# EAGLE board iMX233-OLINUXINO-MAXI_Rev_C2 (EAGLE 4.16), part 1 of 3
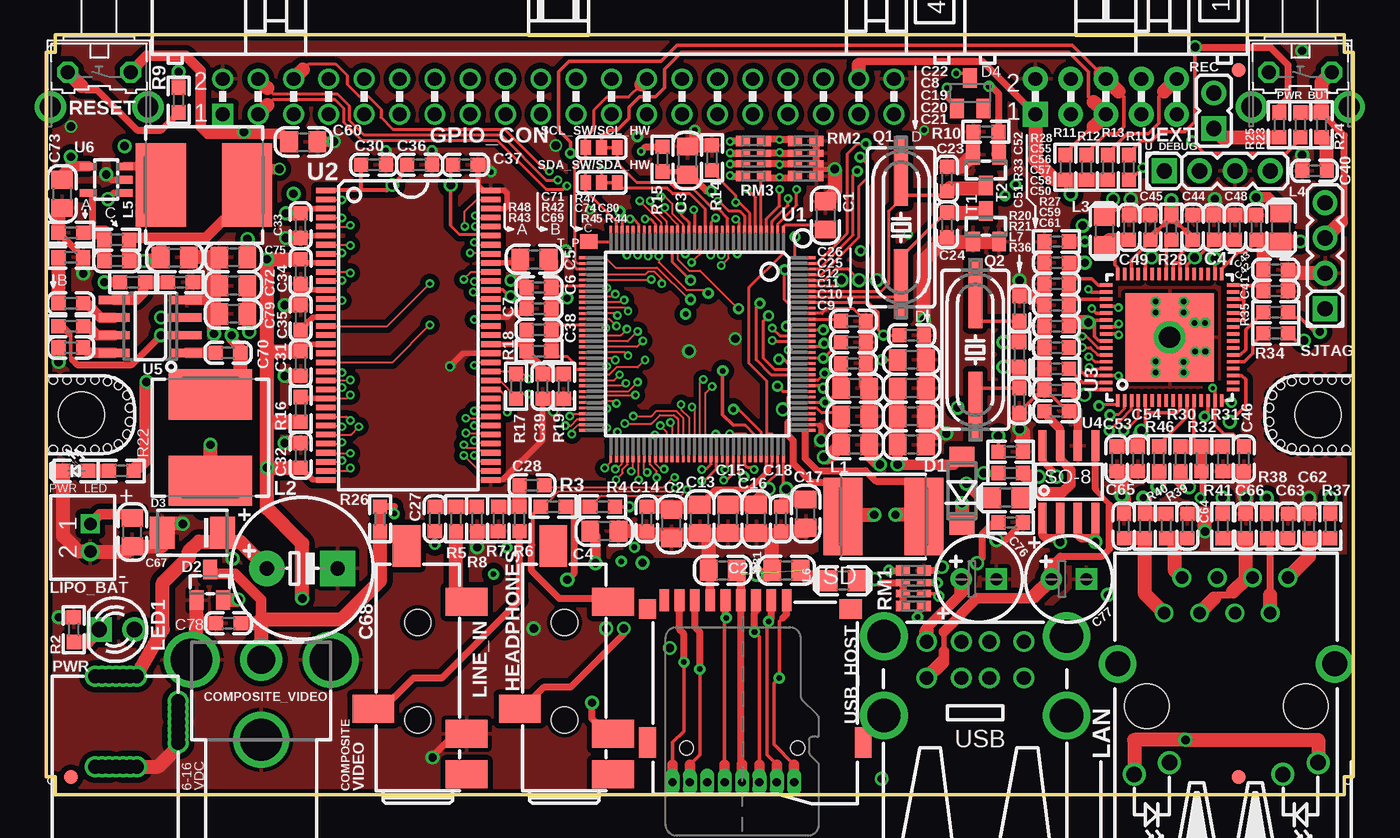
[diagram p0: board, top side]
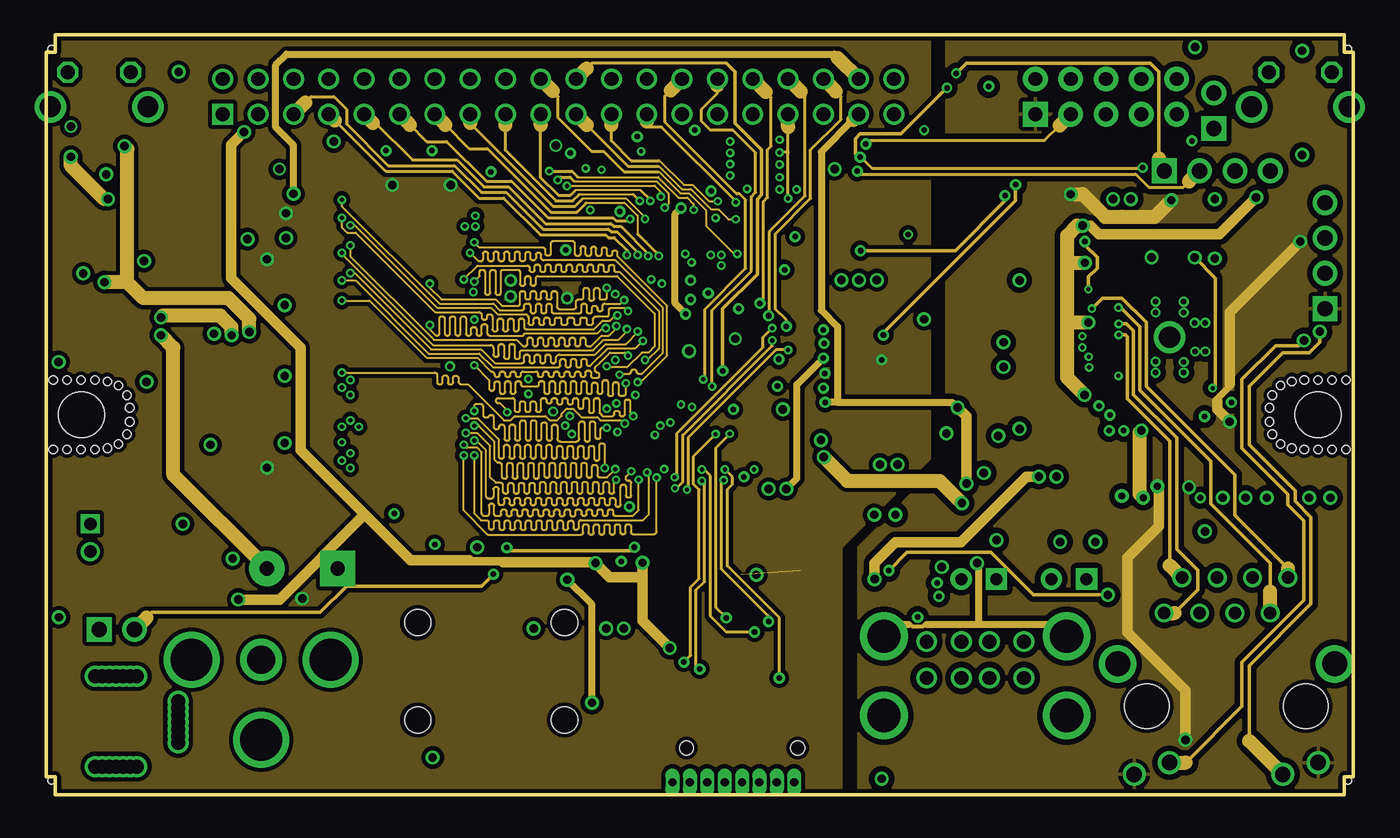
[diagram p1: board, inner layer Route2]
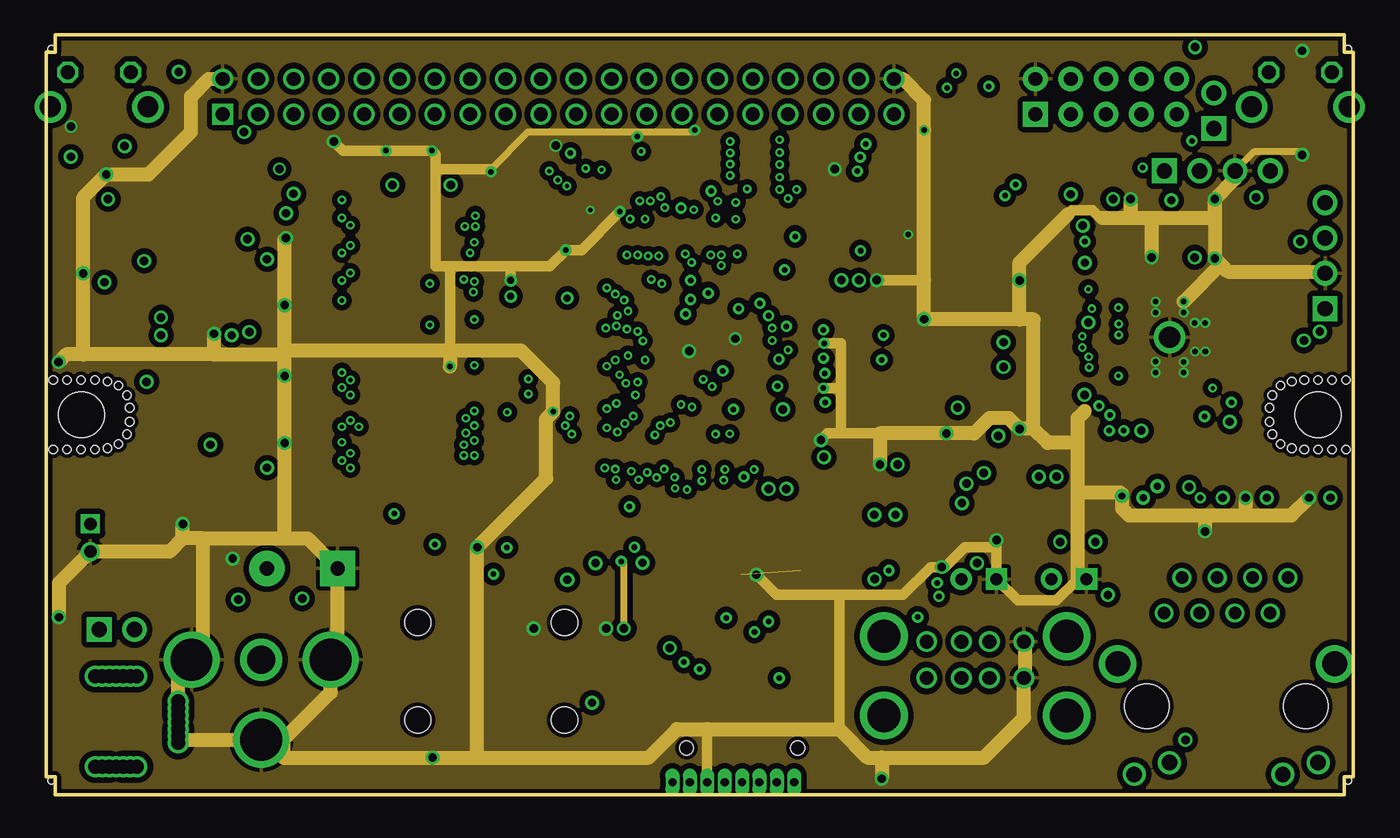
[diagram p2: board, inner layer Route15]
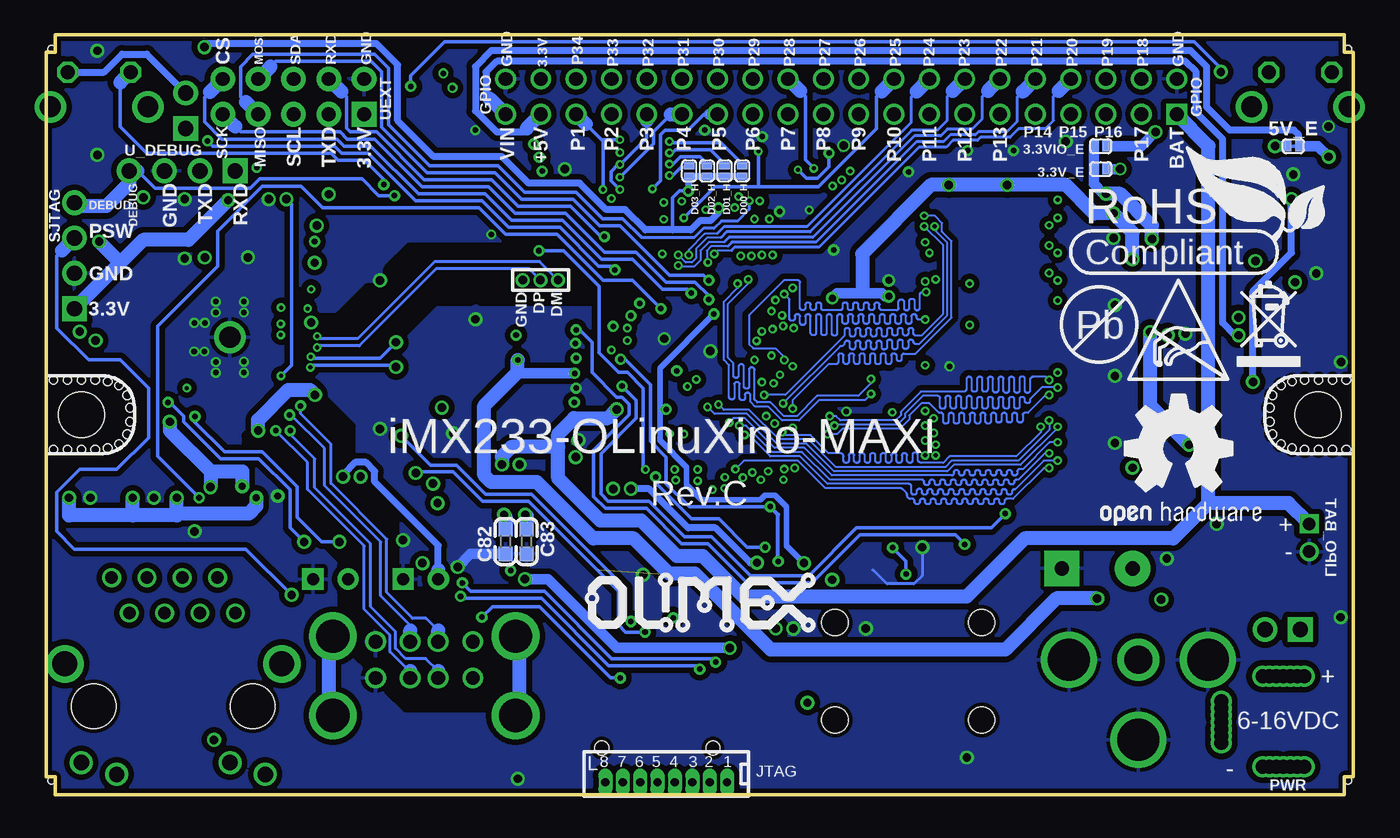
[diagram p3: board, bottom side, seen from below]

Size 93.98 x 54.61 mm. Coordinates in mm from the lower left corner, seen from the top.
Copper layers (1*2*15*16): Top 0.035mm / dielectric 0.5mm / Route2 0.035mm / dielectric 0.5mm / Route15 0.035mm / dielectric 0.5mm / Bottom 0.035mm
Design rules "default": minimum track width 6mil, minimum drill 0.3mm, track to track 0.1499mm, track to pad 6mil, pad to pad 6mil, via to via 6mil, smd to smd 1mil, copper to edge 10mil, drill to drill 8mil, minimum pad ring 6mil, minimum via ring 6mil, stop-mask expansion 4mil, vias tented up to drill 25mil, thermal gap 12mil
Net classes: 1 PWR: width 0.203 mm, drill 0.076 mm, clearance 0.4 mm
tRestrict: 10 lines
bRestrict: 35 lines
Milling: area 11.3,-22.2 to 19.6,-13.8; area 24.2,-25.4 to 29.3,-20.3; area 3.3,-13.7 to 6.6,-10.4; area 1.9,78.1 to 5.7,81.9; area 34.7,-25.4 to 39.8,-20.3; area 88.3,78.1 to 92.1,81.9; 52 lines

## Footprints (pad centres in the part's own frame; a part is rotated, then mirrored left to right if it is on the bottom)
SJ_1_SMALLER = smd 0.508 x 0.762: 1 -0.381,0; 2 0.381,0
SJ_1_SMALLER_CLOSE = smd 0.508 x 0.762: 1 -0.381,0; 2 0.381,0
C0805_5MIL_DWS = smd 1.27 x 1.524: 1 -1.016,0; 2 1.016,0
C0603_DWS = smd 1.016 x 1.016: 1 -0.889,0; 2 0.889,0
E5-10,5 = drill 1.016 pad 2.54 round: + -2.54,0 | drill 1.016 pad 2.54 square: - 2.54,0
E2,5-6,3 = drill 0.864 pad 1.524 round: + -1.27,0 | drill 0.864 pad 1.524 square: - 1.27,0
VIDEO_CON = drill 3 round: GND1 -5,-5.75; GND2 0,0; GND3 5,-5.75 | drill 2 round: IO 0,-5.75
MLL-41 = smd 1.45 x 1.8: A 2.445,0; K -2.445,0
SOT23C(BAT54S) = smd 1 x 1.4: 1 -0.95,-1.1; 2 0.95,-1.1; 3 0,1.1
DO214AA = smd 1.778 x 2.286: A 2.177,0; C -2.177,0
SOT23C = smd 1 x 1.4: 1 -0.95,-1.1; 2 0.95,-1.1; 3 0,1.1
TESTPAD60/90_WITHOUT_MASK = drill 1.524 pad 2.286 round: P$1 0,0
BH40R = drill 1 square: 1 -24.13,-1.27 | drill 1 round: 2 -24.13,1.27; 3 -21.59,-1.27; 4 -21.59,1.27; 5 -19.05,-1.27; 6 -19.05,1.27; 7 -16.51,-1.27; 8 -16.51,1.27; 9 -13.97,-1.27; 10 -13.97,1.27; 11 -11.43,-1.27; 12 -11.43,1.27; 13 -8.89,-1.27; 14 -8.89,1.27; 15 -6.35,-1.27; 16 -6.35,1.27; 17 -3.81,-1.27; 18 -3.81,1.27; 19 -1.27,-1.27; 20 -1.27,1.27; 21 1.27,-1.27; 22 1.27,1.27; 23 3.81,-1.27; 24 3.81,1.27; 25 6.35,-1.27; 26 6.35,1.27; 27 8.89,-1.27; 28 8.89,1.27; 29 11.43,-1.27; 30 11.43,1.27; 31 13.97,-1.27; 32 13.97,1.27; 33 16.51,-1.27; 34 16.51,1.27; 35 19.05,-1.27; 36 19.05,1.27; 37 21.59,-1.27; 38 21.59,1.27; 39 24.13,-1.27; 40 24.13,1.27
PJ-W47S-05D2-LF_5PIN_V2 = smd 2 x 3: 1 2.1,-0.5; 2 14.5,-0.5; 3 6.8,6.2; 5 5,-0.5 | smd 3 x 2: 4 18.5,3.8 | hole 1.9: 6,3; 13,3
WU08S = drill 0.6 pad 0.991 long: 1 -4.375,0; 2 -3.125,0; 3 -1.875,0; 4 -0.625,0; 5 0.625,0; 6 1.875,0; 7 3.125,0; 8 4.375,0
CD53 = smd 2.794 x 5.588: 1 -2.921,0; 2 2.921,0
8X8MM_3131 = smd 3.6 x 6: 1 -3.1,0; 2 3.1,0
L0805_5MIL_DWS = smd 1.27 x 1.524: 1 -1.016,0; 2 1.016,0
RJLD-043TC_PACK = drill 0.9 round: 1 -4.455,6.7; 2 -3.185,9.24; 3 -1.915,6.7; 4 -0.645,9.24; 5 0.625,6.7; 6 1.895,9.24; 7 3.165,6.7; 8 4.435,9.24 | drill 1.1 round: AG -6.61,-4.9; AY 6.61,-4.05; KG -4.07,-4.05; KY 4.07,-4.9 | drill 1.8 round: HI -7.8,3.05; SHI 7.8,3.05 | hole 3.2: -5.715,0; 5.715,0
LED-3.0MM = drill 1.092 pad 1.778 round: A -1.27,0 | drill 1.092 pad 1.778 square: K 1.27,0
DW02S = drill 0.9 square: 1 -1,0 | drill 0.9 round: 2 1,0
PWR_JACK_UNI_MILLING = drill 1 round: + 0,4.75; +1 0,5.25; +2 0,5.75; +3 0,6.25; +4 0,4.25; +5 0,3.75; +6 0,3.25; - -6.5,4.75; -1 -6.5,5.25; -2 -6.5,5.75; -3 -6.5,4.25; -4 -6.5,3.75; -5 -6.5,6.25; -6 -6.5,3.25; -- -3.3,0.3; --1 -3.8,0.3; --2 -4.3,0.3; --3 -4.8,0.3; --4 -2.8,0.3; --5 -2.3,0.3; --6 -1.8,0.3
B3F-31XX = drill 1.016 octagon: 1 -2.261,-1.245; 2 2.261,-1.245 | drill 1.499 pad 2.159 round: 3 -3.505,1.245; 4 3.505,1.245
LED-0603 = smd 1.016 x 1.016: A 0.889,0; C -0.889,0
HC49/SMD2_THIN = smd 5 x 1: 1 -4.064,0; 2 4.064,0
R0603_5MIL_DWS = smd 1.016 x 1.016: 1 -0.889,0; 2 0.889,0
R0603_5MIL_DWS_NA = smd 1.016 x 1.016: 1 -0.889,0; 2 0.889,0
0603_0R = smd 1.016 x 1.016: 1 -0.889,0; 2 0.889,0
JP1 = drill 1.1 pad 1.778 square: 1 0,-1.27 | drill 1.1 pad 1.778 round: 2 0,1.27
R_MATRIX_4 = smd 1.016 x 0.762: 1.1 -0.762,1.27; 1.2 0.762,1.27; 4.1 -0.762,-1.27; 4.2 0.762,-1.27 | smd 1.016 x 0.508: 2.1 -0.762,0.381; 2.2 0.762,0.381; 3.1 -0.762,-0.381; 3.2 0.762,-0.381
SJ_2_SMALL = smd 0.762 x 1.016: 1 -1.143,0; 2 0,0; 3 1.143,0
TFC-WPAPR-08 = smd 0.7 x 1.6: 1 -3.2,-0.125; 2 -2.1,-0.125; 3 -1,-0.125; 4 0.1,-0.125; 5 1.2,-0.125; 6 2.3,-0.125; 7 3.4,-0.125; 8 4.5,-0.125; 9 5.6,-0.125 | smd 1.2 x 1.4: 10 6.8,0.5 | smd 1.6 x 1.4: 11 -7.8,0.5 | smd 1.2 x 2.2: 12 6.8,10.1; 13 -8.7,10.1 | hole 1: 4,10.5; -4,10.5
HN1X4 = drill 1.1 pad 1.778 square: 1 -3.81,0 | drill 1.1 pad 1.778 round: 2 -1.27,0; 3 1.27,0; 4 3.81,0
SOT23 = smd 1 x 1.4: 1 -0.95,-1.1; 2 0.95,-1.1; 3 0,1.1
SMD50/40 = smd 1.27 x 1.016: P$1 0,0
TQFP128LD = smd 0.2 x 1.5: 1 -6.2,-7.75; 2 -5.8,-7.75; 3 -5.4,-7.75; 4 -5,-7.75; 5 -4.6,-7.75; 6 -4.2,-7.75; 7 -3.8,-7.75; 8 -3.4,-7.75; 9 -3,-7.75; 10 -2.6,-7.75; 11 -2.2,-7.75; 12 -1.8,-7.75; 13 -1.4,-7.75; 14 -1,-7.75; 15 -0.6,-7.75; 16 -0.2,-7.75; 17 0.2,-7.75; 18 0.6,-7.75; 19 1,-7.75; 20 1.4,-7.75; 21 1.8,-7.75; 22 2.2,-7.75; 23 2.6,-7.75; 24 3,-7.75; 25 3.4,-7.75; 26 3.8,-7.75; 27 4.2,-7.75; 28 4.6,-7.75; 29 5,-7.75; 30 5.4,-7.75; 31 5.8,-7.75; 32 6.2,-7.75; 65 6.2,7.75; 66 5.8,7.75; 67 5.4,7.75; 68 5,7.75; 69 4.6,7.75; 70 4.2,7.75; 71 3.8,7.75; 72 3.4,7.75; 73 3,7.75; 74 2.6,7.75; 75 2.2,7.75; 76 1.8,7.75; 77 1.4,7.75; 78 1,7.75; 79 0.6,7.75; 80 0.2,7.75; 81 -0.2,7.75; 82 -0.6,7.75; 83 -1,7.75; 84 -1.4,7.75; 85 -1.8,7.75; 86 -2.2,7.75; 87 -2.6,7.75; 88 -3,7.75; 89 -3.4,7.75; 90 -3.8,7.75; 91 -4.2,7.75; 92 -4.6,7.75; 93 -5,7.75; 94 -5.4,7.75; 95 -5.8,7.75; 96 -6.2,7.75 | smd 1.5 x 0.2: 33 7.75,-6.2; 34 7.75,-5.8; 35 7.75,-5.4; 36 7.75,-5; 37 7.75,-4.6; 38 7.75,-4.2; 39 7.75,-3.8; 40 7.75,-3.4; 41 7.75,-3; 42 7.75,-2.6; 43 7.75,-2.2; 44 7.75,-1.8; 45 7.75,-1.4; 46 7.75,-1; 47 7.75,-0.6; 48 7.75,-0.2; 49 7.75,0.2; 50 7.75,0.6; 51 7.75,1; 52 7.75,1.4; 53 7.75,1.8; 54 7.75,2.2; 55 7.75,2.6; 56 7.75,3; 57 7.75,3.4; 58 7.75,3.8; 59 7.75,4.2; 60 7.75,4.6; 61 7.75,5; 62 7.75,5.4; 63 7.75,5.8; 64 7.75,6.2; 97 -7.75,6.2; 98 -7.75,5.8; 99 -7.75,5.4; 100 -7.75,5; 101 -7.75,4.6; 102 -7.75,4.2; 103 -7.75,3.8; 104 -7.75,3.4; 105 -7.75,3; 106 -7.75,2.6; 107 -7.75,2.2; 108 -7.75,1.8; 109 -7.75,1.4; 110 -7.75,1; 111 -7.75,0.6; 112 -7.75,0.2; 113 -7.75,-0.2; 114 -7.75,-0.6; 115 -7.75,-1; 116 -7.75,-1.4; 117 -7.75,-1.8; 118 -7.75,-2.2; 119 -7.75,-2.6; 120 -7.75,-3; 121 -7.75,-3.4; 122 -7.75,-3.8; 123 -7.75,-4.2; 124 -7.75,-4.6; 125 -7.75,-5; 126 -7.75,-5.4; 127 -7.75,-5.8; 128 -7.75,-6.2
66TSOP-II = smd 0.4 x 1.4: 1 -10.4,-5.925; 2 -9.75,-5.925; 3 -9.1,-5.925; 4 -8.45,-5.925; 5 -7.8,-5.925; 6 -7.15,-5.925; 7 -6.5,-5.925; 8 -5.85,-5.925; 9 -5.2,-5.925; 10 -4.55,-5.925; 11 -3.9,-5.925; 12 -3.25,-5.925; 13 -2.6,-5.925; 14 -1.95,-5.925; 15 -1.3,-5.925; 16 -0.65,-5.925; 17 0,-5.925; 18 0.65,-5.925; 19 1.3,-5.925; 20 1.95,-5.925; 21 2.6,-5.925; 22 3.25,-5.925; 23 3.9,-5.925; 24 4.55,-5.925; 25 5.2,-5.925; 26 5.85,-5.925; 27 6.5,-5.925; 28 7.15,-5.925; 29 7.8,-5.925; 30 8.45,-5.925; 31 9.1,-5.925; 32 9.75,-5.925; 33 10.4,-5.925; 34 10.4,5.925; 35 9.75,5.925; 36 9.1,5.925; 37 8.45,5.925; 38 7.8,5.925; 39 7.15,5.925; 40 6.5,5.925; 41 5.85,5.925; 42 5.2,5.925; 43 4.55,5.925; 44 3.9,5.925; 45 3.25,5.925; 46 2.6,5.925; 47 1.95,5.925; 48 1.3,5.925; 49 0.65,5.925; 50 0,5.925; 51 -0.65,5.925; 52 -1.3,5.925; 53 -1.95,5.925; 54 -2.6,5.925; 55 -3.25,5.925; 56 -3.9,5.925; 57 -4.55,5.925; 58 -5.2,5.925; 59 -5.85,5.925; 60 -6.5,5.925; 61 -7.15,5.925; 62 -7.8,5.925; 63 -8.45,5.925; 64 -9.1,5.925; 65 -9.75,5.925; 66 -10.4,5.925
QFN64 = smd 0.9 x 0.25: 1 -4.55,3.75; 2 -4.55,3.25; 3 -4.55,2.75; 4 -4.55,2.25; 5 -4.55,1.75; 6 -4.55,1.25; 7 -4.55,0.75; 8 -4.55,0.25; 9 -4.55,-0.25; 10 -4.55,-0.75; 11 -4.55,-1.25; 12 -4.55,-1.75; 13 -4.55,-2.25; 14 -4.55,-2.75; 15 -4.55,-3.25; 16 -4.55,-3.75; 33 4.55,-3.75; 34 4.55,-3.25; 35 4.55,-2.75; 36 4.55,-2.25; 37 4.55,-1.75; 38 4.55,-1.25; 39 4.55,-0.75; 40 4.55,-0.25; 41 4.55,0.25; 42 4.55,0.75; 43 4.55,1.25; 44 4.55,1.75; 45 4.55,2.25; 46 4.55,2.75; 47 4.55,3.25; 48 4.55,3.75 | smd 0.25 x 0.9: 17 -3.75,-4.55; 18 -3.25,-4.55; 19 -2.75,-4.55; 20 -2.25,-4.55; 21 -1.75,-4.55; 22 -1.25,-4.55; 23 -0.75,-4.55; 24 -0.25,-4.55; 25 0.25,-4.55; 26 0.75,-4.55; 27 1.25,-4.55; 28 1.75,-4.55; 29 2.25,-4.55; 30 2.75,-4.55; 31 3.25,-4.55; 32 3.75,-4.55; 49 3.75,4.55; 50 3.25,4.55; 51 2.75,4.55; 52 2.25,4.55; 53 1.75,4.55; 54 1.25,4.55; 55 0.75,4.55; 56 0.25,4.55; 57 -0.25,4.55; 58 -0.75,4.55; 59 -1.25,4.55; 60 -1.75,4.55; 61 -2.25,4.55; 62 -2.75,4.55; 63 -3.25,4.55; 64 -3.75,4.55 | smd 6.35 x 6.35: 65 0,0
SO-8 = smd 0.6 x 2.2: 1 -1.905,-2.6; 2 -0.635,-2.6; 3 0.635,-2.6; 4 1.905,-2.6; 5 1.905,2.6; 6 0.635,2.6; 7 -0.635,2.6; 8 -1.905,2.6
SOIC8 = smd 0.6 x 2.2: 1 -1.905,-2.6; 2 -0.635,-2.6; 3 0.635,-2.6; 4 1.905,-2.6; 5 1.905,2.6; 6 0.635,2.6; 7 -0.635,2.6; 8 -1.905,2.6
SOT23-5 = smd 0.55 x 1.2: 1 -0.95,-1.3; 2 0,-1.3; 3 0.95,-1.3; 4 0.95,1.3; 5 -0.95,1.3
FIDUCIAL-1X2 = smd 1 x 1: 1 0,0
JM42_PACTEC-101X61X25_MILLED = hole 3.3: 2.54,27.305; 91.44,27.305 | hole 0.6: 0.5,24.8; 1.5,24.8; 2.5,24.8; 3.5,24.8; 4.4,24.9; 0.5,29.8; 1.5,29.8; 2.5,29.8; 3.5,29.8; 4.4,29.7; 5.2,25.2; 5.2,29.4; 5.8,28.7; 5.8,25.9; 6,26.8; 6,27.8; 93.45,29.8; 92.45,29.8; 91.45,29.8; 90.45,29.8; 89.55,29.7; 93.45,24.8; 92.45,24.8; 91.45,24.8; 90.45,24.8; 89.55,24.9; 88.75,29.4; 88.75,25.2; 88.15,25.9; 88.15,28.7; 87.95,27.8; 87.95,26.8 | hole 0.5: 0.381,1.016; 93.599,1.016; 93.599,53.594; 0.381,53.594
BH10R = drill 1 pad 1.778 square: 1 -5.08,-1.27 | drill 1 pad 1.778 round: 2 -5.08,1.27; 3 -2.54,-1.27; 4 -2.54,1.27; 5 0,-1.27; 6 0,1.27; 7 2.54,-1.27; 8 2.54,1.27; 9 5.08,-1.27; 10 5.08,1.27
USB_TWO_LEVEL = drill 1 round: 1.1 -3.5,2.62; 1.2 -1,2.62; 1.3 1,2.62; 1.4 3.5,2.62; 2.1 -3.5,0; 2.2 -1,0; 2.3 1,0; 2.4 3.5,0 | drill 2.4 round: GND1 -6.57,-2.7; GND2 6.57,-2.7; GND3 6.57,3; GND4 -6.57,3

## Placement (x,y rotation side)
3.3V_E  Close  [SJ_1_SMALLER]  18.16,44.96 180 bottom
3.3VIO_E  Open  [SJ_1_SMALLER]  18.16,46.61 0 bottom
5V_E  Close  [SJ_1_SMALLER_CLOSE]  4.32,46.61 0 bottom
C1  22uF/6.3V  [C0805_5MIL_DWS]  56.03,41.63 270 top
C2  22uF/6.3V  [C0805_5MIL_DWS]  44.96,19.43 90 top
C3  22uF/6.3V  [C0805_5MIL_DWS]  46.1,45.57 270 top
C4  22uF/6.3V  [C0805_5MIL_DWS]  40.13,18.92 180 top
C5  22uF/6.3V  [C0805_5MIL_DWS]  35.1,38.48 0 top
C6  100nF  [C0603_DWS]  35.43,36.45 0 top
C7  100nF  [C0603_DWS]  35.43,34.92 0 top
C8  22uF/6.3V  [C0805_5MIL_DWS]  62.23,31.24 180 top
C9  22uF/6.3V  [C0805_5MIL_DWS]  58.17,25.15 180 top
C10  22uF/6.3V  [C0805_5MIL_DWS]  58.17,27.18 180 top
C11  22uF/6.3V  [C0805_5MIL_DWS]  58.17,29.21 180 top
C12  100nF  [C0603_DWS]  58.04,30.99 180 top
C13  22uF/6.3V  [C0805_5MIL_DWS]  46.99,19.81 90 top
C14  100nF  [C0603_DWS]  43.18,19.81 90 top
C15  22uF/6.3V  [C0805_5MIL_DWS]  49.02,19.81 90 top
C16  22uF/6.3V  [C0805_5MIL_DWS]  51.05,19.81 90 top
C17  22uF/6.3V  [C0805_5MIL_DWS]  54.61,20.19 90 top
C18  100nF  [C0603_DWS]  52.83,19.81 90 top
C19  22uF/6.3V  [C0805_5MIL_DWS]  62.23,29.21 180 top
C20  22uF/6.3V  [C0805_5MIL_DWS]  62.23,27.18 180 top
C21  22uF/6.3V  [C0805_5MIL_DWS]  62.23,25.15 180 top
C22  100nF  [C0603_DWS]  62.23,33.02 180 top
C23  4.7pF  [C0603_DWS]  64.77,44.25 270 top
C24  4.7pF  [C0603_DWS]  64.77,40.94 90 top
C25  100nF  [C0603_DWS]  58.04,32.51 180 top
C26  1uF  [C0603_DWS]  58.04,34.04 180 top
C27  1uF  [C0603_DWS]  27.94,19.81 270 top
C28  1uF  [C0603_DWS]  34.92,22.23 0 top
C29  22uF/6.3V  [C0805_5MIL_DWS]  53.21,16.13 0 top
C30  100nF  [C0603_DWS]  23.55,45.26 180 top
C31  100nF  [C0603_DWS]  18.29,30.99 90 top
C32  100nF  [C0603_DWS]  18.29,24.38 270 top
C33  100nF  [C0603_DWS]  18.29,40.89 90 top
C34  100nF  [C0603_DWS]  18.29,37.59 90 top
C35  10uF/10V  [C0603_DWS]  18.29,34.29 270 top
C36  100nF  [C0603_DWS]  26.85,45.26 180 top
C37  10uF/10V  [C0603_DWS]  30.15,45.26 180 top
C38  100nF  [C0603_DWS]  35.43,33.4 180 top
C39  100nF  [C0603_DWS]  35.69,29.34 90 top
C40  100nF  [C0603_DWS]  91.19,44.83 180 top
C41  100nF  [C0603_DWS]  88.39,36.2 180 top
C42  100nF  [C0603_DWS]  88.39,37.72 180 top
C43  100nF  [C0603_DWS]  87,40.77 270 top
C44  100nF  [C0603_DWS]  82.42,40.77 270 top
C45  100nF  [C0603_DWS]  79.38,40.77 270 top
C46  100nF  [C0603_DWS]  86.11,24.13 90 top
C47  100nF  [C0603_DWS]  83.95,40.77 270 top
C48  4.7uF  [C0603_DWS]  85.47,40.77 270 top
C49  100nF  [C0603_DWS]  77.85,40.77 270 top
C50  4.7uF  [C0603_DWS]  72.64,32.13 0 top
C51  33pF  [C0603_DWS]  69.98,28.32 270 top
C52  33pF  [C0603_DWS]  69.98,34.92 90 top
C53  100nF  [C0603_DWS]  76.96,24.13 270 top
C54  100nF  [C0603_DWS]  78.49,24.13 270 top
C55  100nF  [C0603_DWS]  72.64,38.23 180 top
C56  100nF  [C0603_DWS]  72.64,36.7 180 top
C57  100nF  [C0603_DWS]  72.64,35.18 180 top
C58  100nF  [C0603_DWS]  72.64,33.66 180 top
C59  100nF  [C0603_DWS]  72.64,29.08 180 top
C60  22uF/6.3V  [C0805_5MIL_DWS]  18.49,46.91 0 top
C61  10uF/10V  [C0603_DWS]  72.64,27.56 0 top
C62  15pF  [C0603_DWS]  90.81,19.3 90 top
C63  15pF  [C0603_DWS]  89.28,19.3 90 top
C64  15pF  [C0603_DWS]  82.04,19.3 90 top
C65  15pF  [C0603_DWS]  77.47,19.3 90 top
C66  22nF  [C0603_DWS]  86.23,19.3 90 top
C67  22uF/6.3V  [C0805_5MIL_DWS]  6.2,18.87 90 top
C68  470uF/25V/LOWESR/105C  [E5-10,5]  18.41,16.26 0 top
C69  100nF  [C0603_DWS]  1.78,32.13 180 top
C70  10nF  [C0603_DWS]  13.08,31.75 0 top
C71  3.3nF  [C0603_DWS]  1.78,35.31 180 top
C72  22uF/6.3V  [C0805_5MIL_DWS]  13.46,36.58 180 top
C73  22uF/6.3V  [C0805_5MIL_DWS]  1.14,43.18 270 top
C74  22pF  [C0603_DWS]  5.08,38.35 180 top
C75  22uF/6.3V  [C0805_5MIL_DWS]  13.46,38.61 180 top
C76  100uF/16V/LOWESR/105C/6.3x11mm_RM2.5  [E2,5-6,3]  67.06,15.49 0 top
C77  100uF/16V/LOWESR/105C/6.3x11mm_RM2.5  [E2,5-6,3]  73.53,15.49 0 top
C78  47pF  [C0603_DWS]  13.11,12.32 180 top
C79  22uF/6.3V  [C0805_5MIL_DWS]  13.46,34.54 180 top
C80  22uF/6.3V  [C0805_5MIL_DWS]  9.25,38.61 0 top
C81  22uF/6.3V  [C0805_5MIL_DWS]  48.64,16.13 0 top
C82  NA  [C0603_DWS]  60.96,18.19 90 bottom
C83  100pF  [C0603_DWS]  59.44,18.19 90 bottom
COMPOSITE_VIDEO  VIDEO_CON  [VIDEO_CON]  15.45,3.94 180 top
D00_H  Close  [SJ_1_SMALLER]  43.94,44.83 270 bottom
D1  SS14  [MLL-41]  65.84,21.84 90 top
D01_H  Open  [SJ_1_SMALLER]  45.21,44.83 270 bottom
D2  BAT54S  [SOT23C(BAT54S)]  11.79,15.09 0 top
D02_H  Open  [SJ_1_SMALLER]  46.48,44.83 270 bottom
D3  SMBJ16A  [DO214AA]  10.52,18.82 180 top
D03_H  Close  [SJ_1_SMALLER]  47.75,44.83 270 bottom
D4  BAT54C  [SOT23C]  66.42,50.42 0 top
GND  TESTPADTESTPAD60/90_WITHOUT_MASK  [TESTPAD60/90_WITHOUT_MASK]  80.77,32.87 0 top
GPIO_CON  BH40R  [BH40R]  36.83,50.16 0 top
HEADPHONES  AUDIO_JACK_5PINPJ-W47S-05D2-LF_V2  [PJ-W47S-05D2-LF_5PIN_V2]  40.26,-0.64 90 top
JTAG  NA(WU08S)  [WU08S]  49.4,0.89 180 bottom
L1  22uH/1.3A/SW68  [CD53]  60.2,19.99 0 top
L2  10uH/2.3A/YS75/7x8  [8X8MM_3131]  11.81,25.65 270 top
L3  FB0805/600R/2A  [L0805_5MIL_DWS]  76.07,40.51 270 top
L4  FB0805/600R/2A  [L0805_5MIL_DWS]  88.77,40.77 90 top
L5  2.2uH/3A/YS75/7x8  [8X8MM_3131]  11.35,43.81 0 top
L6  CL470nH/0805/1.76R/250mA  [L0805_5MIL_DWS]  57.28,15.37 180 top
L7  FB0805/600R/2A  [L0805_5MIL_DWS]  69.01,21.34 180 top
LAN  RJLD-043TC  [RJLD-043TC_PACK]  84.84,6.35 0 top
LED1  LED/GREEN/3MM  [LED-3.0MM]  5.08,11.86 180 top
LINE_IN  AUDIO_JACK_5PINPJ-W47S-05D2-LF_V2  [PJ-W47S-05D2-LF_5PIN_V2]  29.72,-0.64 90 top
LIPO_BAT  DW02S  [DW02S]  3.17,18.47 270 top
PWR  YDJ-1136  [PWR_JACK_UNI_MILLING]  9.78,8.51 90 top
PWR_BUT  TV-06B  [B3F-31XX]  90.17,50.67 180 top
PWR_LED  LED/RED/0603  [LED-0603]  2.11,23.27 0 top
Q1  Q24.000MHz/HC-49SM/SMD/20ppm/20pF  [HC49/SMD2_THIN]  61.47,40.77 90 top
Q2  Q25.000MHz/HC-49SM  [HC49/SMD2_THIN]  66.8,31.97 270 top
R1  4.7k  [R0603_5MIL_DWS]  77.85,45.09 90 top
R2  560R  [R0603_5MIL_DWS]  1.98,11.86 270 top
R3  120R  [R0603_5MIL_DWS]  36.45,20.7 180 top
R4  120R  [R0603_5MIL_DWS]  40.01,20.7 0 top
R5  10k  [R0603_5MIL_DWS]  29.46,19.81 270 top
R6  10k  [R0603_5MIL_DWS]  34.04,19.81 270 top
R7  4.7k  [R0603_5MIL_DWS]  32.51,19.81 90 top
R8  4.7k  [R0603_5MIL_DWS]  30.99,19.81 90 top
R9  47k  [R0603_5MIL_DWS]  9.53,49.91 270 top
R10  47k  [R0603_5MIL_DWS]  67.56,47.65 180 top
R11  2.2k  [R0603_5MIL_DWS]  73.28,45.09 270 top
R12  2.2k  [R0603_5MIL_DWS]  74.8,45.09 270 top
R13  47k  [R0603_5MIL_DWS]  76.33,45.09 270 top
R14  NA(47k)  [R0603_5MIL_DWS]  47.88,45.77 270 top
R15  47k  [R0603_5MIL_DWS]  44.32,45.67 90 top
R16  10k  [R0603_5MIL_DWS]  18.29,27.69 270 top
R17  120R  [R0603_5MIL_DWS]  33.78,29.34 270 top
R18  1k/1%  [R0603_5MIL_DWS]  35.43,31.88 0 top
R19  1k/1%  [R0603_5MIL_DWS]  37.21,29.34 90 top
R20  1M  [R0603_5MIL_DWS]  69.34,24.64 0 top
R21  10k  [R0603_5MIL_DWS]  69.34,23.11 0 top
R22  1k  [R0603_5MIL_DWS]  5.41,23.27 180 top
R23  1k  [R0603_5MIL_DWS]  90.17,48.13 90 top
R24  1k  [R0603_5MIL_DWS]  91.69,48.13 90 top
R25  10k  [R0603_5MIL_DWS_NA]  88.65,48.13 90 top
R26  0R(Board_Mounted)  [0603_0R]  24,19.81 270 top
R27  12k/1%  [R0603_5MIL_DWS]  72.64,30.61 0 top
R28  12.4k/1%  [R0603_5MIL_DWS]  72.64,39.75 0 top
R29  10k  [R0603_5MIL_DWS]  80.9,40.77 270 top
R30  NA  [R0603_5MIL_DWS]  81.53,24.13 90 top
R31  10k  [R0603_5MIL_DWS]  84.58,24.13 90 top
R32  0R(Board_Mounted)  [0603_0R]  83.06,24.13 90 top
R33  1M  [R0603_5MIL_DWS]  69.98,31.62 270 top
R34  560R  [R0603_5MIL_DWS]  88.39,33.15 0 top
R35  560R  [R0603_5MIL_DWS]  88.39,34.67 0 top
R36  560R  [R0603_5MIL_DWS]  69.34,19.56 180 top
R37  49.9R/1%  [R0603_5MIL_DWS]  92.33,19.3 90 top
R38  49.9R/1%  [R0603_5MIL_DWS]  87.76,19.3 90 top
R39  49.9R/1%  [R0603_5MIL_DWS]  80.52,19.3 90 top
R40  49.9R/1%  [R0603_5MIL_DWS]  78.99,19.3 90 top
R41  10R/1%  [R0603_5MIL_DWS]  84.58,19.3 90 top
R42  47k  [R0603_5MIL_DWS]  1.78,33.66 0 top
R43  2.2k  [R0603_5MIL_DWS]  1.78,38.61 0 top
R44  1.1k/1%  [R0603_5MIL_DWS]  9.65,36.83 0 top
R45  4.99k/1%  [R0603_5MIL_DWS]  6.22,36.83 180 top
R46  10k  [R0603_5MIL_DWS]  80.01,24.13 90 top
R47  4.99k/1%  [R0603_5MIL_DWS]  5.08,39.88 180 top
R48  1.1k/1%  [R0603_5MIL_DWS]  1.78,40.39 180 top
REC  NA(HN1x2)  [JP1]  83.95,49.15 0 top
RESET  TV-06B  [B3F-31XX]  3.81,50.67 180 top
RM1  RA1206_(4X0603)_4B8_100K  [R_MATRIX_4]  62.36,14.83 180 top
RM2  RA1206_(4X0603)_4B8_47K  [R_MATRIX_4]  54.61,45.72 180 top
RM3  RA1206_(4X0603)_4B8_4.7K  [R_MATRIX_4]  50.85,45.72 180 top
SCL_SW/SCL_HW  SCL_SW:Open/SCL_HW:Close  [SJ_2_SMALL]  39.93,46.51 180 top
SD  MICRO_SD/MMC_CP_NEWTFC-WPAPR-08  [TFC-WPAPR-08]  50.04,13.84 180 top
SDA_SW/SDA_HW  SDA_SW:Open/SDA_HW:Close  [SJ_2_SMALL]  39.93,43.99 180 top
SJTAG  (NA)HN1X4  [HN1X4]  91.95,38.73 90 top
T1  BC846B  [SOT23]  67.56,40.84 0 top
T2  BC846B  [SOT23]  67.56,44.88 180 top
T_P  TESTPAD50/40  [SMD50/40]  39.01,39.75 0 top
U1  MCIMX233CAG4C  [TQFP128LD]  46.8,32.38 180 top
U2  HY5DU121622D(L)T(P)-J  [66TSOP-II]  26.04,33.02 270 top
U3  LAN9512-JZX  [QFN64]  80.77,32.86 90 top
U4  MIC2026-1YM  [SO-8]  73.53,22.48 0 top
U5  MP1482DS  [SOIC8]  7.49,33.66 90 top
U6  SY8008C(AA)C  [SOT23-5]  4.32,44.2 90 top
U$1  FIDUCIAL1X2  [FIDUCIAL-1X2]  1.78,1.27 180 top
U$2  FIDUCIAL1X2  [FIDUCIAL-1X2]  85.72,1.27 180 top
U$3  FIDUCIAL1X2  [FIDUCIAL-1X2]  85.72,52.07 180 top
U$5  [LOGO-OPENHARDWARE_8X8]  12.57,24.77 0 bottom
U$6  [JM42_PACTEC-101X61X25_MILLED]  0,0 0 top
U$8  [OLIMEX1_V]  37.51,11.53 0 bottom
U$9  [PB]  18.29,33.78 0 bottom
U$10  [ESD_SYMBOL]  16.13,29.84 0 bottom
U$11  [RECYCLE_BIN1/8]  8.38,30.73 0 bottom
U$12  [ROHS]  19.3,38.1 0 bottom
U_DEBUG  HN1X4  [HN1X4]  84.2,44.83 0 top
UEXT  BH10R  [BH10R]  76.2,50.16 0 top
USB_HOST  USB_TWO_LEVEL  [USB_TWO_LEVEL]  66.8,8.38 0 top

## Library data of the parts
3.3V_E 3.3VIO_E 5V_E D00_H D01_H D02_H D03_H REC SCL_SW/SCL_HW SDA_SW/SDA_HW = jumper
C1-C83 L1 L3 L4 L6 L7 R1-R25 R27-R31 R33-R48 = rcl
COMPOSITE_VIDEO LAN SD USB_HOST = OLIMEX_CONNECTORS
D1 GND HEADPHONES LINE_IN PWR T_P = gogo
D2 D4 T1 T2 = semicon-smd-ipc
D3 L2 L5 R26 R32 RM1-RM3 = OLIMEX_DISCRET
GPIO_CON UEXT = con-harting-ml
JTAG LIPO_BAT SJTAG U_DEBUG = Penko
LED1 PWR_LED = DOUBLE-SIDE
PWR_BUT RESET = switch-omron
Q1 Q2 = crystal
U1-U6 = OLIMEX_IC
U$1-U$3 = SparkFunEagle-6-6-07
U$5 U$8-U$12 = olimex_logo1
U$6 = OLIMEX_CASES

## Nets
+5V: 5V_E.2 C11.2 C12.2 C73.1 GPIO_CON.37 L7.2 R22.1 U1.102 U6.1 U6.4
+15V: C68.+ D3.C GPIO_CON.39 PWR.+ R42.1 U5.2
+24V: C19.2 C20.2 C21.2 C67.2 D1.A GPIO_CON.1 LIPO_BAT.1 U1.100 U1.103
A0: U1.76 U2.29
A1: U1.75 U2.30
A2: U1.74 U2.31
A3: U1.73 U2.32
A4: U1.72 U2.35
A5: U1.71 U2.36
A6: U1.70 U2.37
A7: U1.69 U2.38
A8: U1.68 U2.39
A9: U1.67 U2.40
A10: U1.66 U2.28
A11: U1.65 U2.41
A12: U1.64 U2.42
AUART1_RXD: U1.128 UEXT.4
AUART1_TXD: U1.127 UEXT.3
BA0: U1.79 U2.26
BA1: U1.80 U2.27
CASN: U1.61 U2.22
CKE: U1.78 U2.44
CLK: R17.2 U1.36 U2.45
CLKN: R17.1 U1.37 U2.46
CS: R16.1 U1.63 U2.24
D0: U1.41 U2.2
D1: U1.43 U2.4
D2: U1.42 U2.5
D3: U1.44 U2.7
D4: U1.47 U2.8
D5: U1.48 U2.10
D6: U1.49 U2.11
D7: U1.50 U2.13
D8: U1.51 U2.54
D9: U1.52 U2.56
D10: U1.54 U2.57
D11: U1.55 U2.59
D12: U1.57 U2.60
D13: U1.58 U2.62
D14: U1.60 U2.63
D15: U1.59 U2.65
DCDC_VDDA: C17.2 C18.2 C25.2 U1.96 U1.110
DCDC_VDDD: C1.2 C2.2 C13.2 C14.2 U1.1 U1.93 U1.94
DEBUG: SJTAG.4 U1.89 U_DEBUG.4
DQM0: U1.46 U2.20
DQM1: U1.56 U2.47
DQS0: U1.39 U2.16
DQS1: U1.40 U2.51
GND [PWR]: C1.1 C2.1 C3.1 C4.1 C5.1 C6.1 C7.1 C8.1 C9.1 C10.1 C11.1 C12.1 C13.1 C14.1 C15.1 C16.1 C17.1 C18.1 C19.1 C20.1 C21.1 C22.1 C23.1 C24.1 C25.1 C26.1 C29.1 C30.1 C31.1 C32.1 C33.1 C34.1 C35.1 C36.1 C37.1 C39.1 C40.2 C41.1 C42.1 C43.1 C44.1 C45.1 C46.1 C47.1 C48.1 C49.1 C50.1 C51.2 C52.2 C53.2 C54.2 C55.2 C56.2 C57.2 C58.2 C59.2 C60.2 C61.2 C62.2 C63.2 C64.2 C65.2 C66.2 C67.1 C68.- C69.2 C72.2 C73.2 C75.2 C76.- C77.- C78.2 C79.2 C80.2 C81.1 C82.1 C83.1 COMPOSITE_VIDEO.GND1 COMPOSITE_VIDEO.GND2 COMPOSITE_VIDEO.GND3 D2.1 D3.A GND.P$1 GPIO_CON.2 GPIO_CON.40 JTAG.3 LINE_IN.5 LIPO_BAT.2 PWR.- PWR.-- PWR_LED.C R2.1 R7.1 R8.1 R10.2 R14.1 R19.1 R20.2 R27.1 R28.1 R31.1 R36.1 R43.2 R44.2 R48.2 RM1.4.1 RM2.1.1 RM2.2.1 RM2.3.1 RM2.4.1 SD.6 SJTAG.2 T1.1 T1.2 T2.2 U1.30 U1.35 U1.98 U1.105 U1.112 U1.118 U2.6 U2.12 U2.34 U2.48 U2.52 U2.58 U2.64 U2.66 U3.34 U3.44 U3.65 U4.6 U5.4 U6.2 U_DEBUG.3 UEXT.2 USB_HOST.1.4 USB_HOST.2.4
HP_VGND: HEADPHONES.5 R3.1 R4.1 U1.111
I2C_SCL: R11.1 SCL_SW/SCL_HW.2 UEXT.5
I2C_SDA: R12.1 SDA_SW/SDA_HW.2 UEXT.6
LED1 [PWR]: LED1.A U1.88
N$1: C61.1 L7.1 U4.7
N$2: C46.2 C47.2 C48.2 U3.15 U3.38
N$3: C49.2 L3.2 U3.48
N$4: C78.1 COMPOSITE_VIDEO.IO D2.3 R26.2
N$5: R46.2 U3.11
N$6: LINE_IN.2 R5.2
N$7: C38.2 C39.2 R18.1 R19.2 U2.49
N$8: R25.1 REC.1
N$10: D4.3 U_DEBUG.1
N$11: C50.2 L3.1 U3.62
N$12: R27.2 U3.63
N$15: HEADPHONES.2 R3.2 U1.113
N$17: R28.2 U3.50
N$18: C82.2 L1.2 U1.97
N$19: C83.2 L1.1 U1.99
N$21: HEADPHONES.3 R4.2 U1.109
N$23: 5V_E.1 C72.1 C79.1 L2.2 R45.2
N$24: R29.2 U3.41
N$25: C26.2 U1.117
N$29: LINE_IN.3 R6.2
N$30: C51.1 Q2.2 R33.2 U3.61
N$32: C28.1 R6.1 R7.2
N$33: C27.1 R5.1 R8.2
N$34: C27.2 U1.115
N$35: C28.2 U1.114
N$36: C69.1 U5.8
N$37: R42.2 U5.7
N$38: C40.1 R24.1
N$39: C52.1 Q2.1 R33.1 U3.60
N$40: R34.1 U3.21
N$41: R35.1 U3.22
N$42: LED1.K R2.2
N$43: R9.1 R10.1 T2.1
N$45: LAN.KG R34.2
N$46: C70.1 U5.1
N$47: LAN.KY R35.2
N$48: C62.1 LAN.8 R37.1 U3.53
N$49: R30.2 R31.2 R32.2 U3.12
N$50: C70.2 L2.1 U5.3
N$51: C63.1 LAN.7 R38.1 U3.52
N$52: C64.1 LAN.2 R39.1 U3.56
N$53: C65.1 LAN.1 R40.1 U3.55
N$54: C66.1 LAN.3 LAN.6 R41.1
N$55: U3.1 USB_HOST.1.2
N$56: U3.2 USB_HOST.1.3
N$57: U3.3 USB_HOST.2.2
N$58: U3.4 USB_HOST.2.3
N$59: R36.2 USB_HOST.GND1 USB_HOST.GND2 USB_HOST.GND3 USB_HOST.GND4
N$60: C71.1 U5.6
N$61: C71.2 R43.1
N$62: R44.1 R45.1 U5.5
N$64: L5.1 U6.3
N$65: 3.3V_E.1 C74.1 C80.1 L5.2 R47.1
N$66: C74.2 R47.2 R48.1 U6.5
N$101: D03_H.1 RM3.1.2
N$103: D02_H.1 RM3.2.2
N$104: D01_H.1 RM3.3.2
N$105: D00_H.1 RM3.4.2
N$129: PWR_LED.A R22.2
PIN1/LCD_D00: GPIO_CON.35 RM2.4.2 RM3.4.1 U1.2
PIN2/LCD_D01: GPIO_CON.33 RM2.3.2 RM3.3.1 U1.3
PIN3/LCD_D02: GPIO_CON.31 RM2.2.2 RM3.2.1 U1.4
PIN4/LCD_D03: GPIO_CON.29 RM2.1.2 RM3.1.1 U1.5
PIN5/LCD_D04: GPIO_CON.27 U1.6
PIN6/LCD_D05: GPIO_CON.25 R14.2 U1.7
PIN7/LCD_D06: GPIO_CON.23 U1.8
PIN8/LCD_D07: GPIO_CON.21 U1.9
PIN9/LCD_D08/SSP2_MISO: GPIO_CON.19 U1.22 UEXT.7
PIN10/LCD_D09: GPIO_CON.17 U1.23
PIN11/LCD_D10: GPIO_CON.15 U1.24
PIN12/LCD_D11/UEXT_CS: GPIO_CON.13 R13.1 U1.25 UEXT.10
PIN13/LCD_D12: GPIO_CON.11 U1.27
PIN14/LCD_D13: GPIO_CON.9 U1.26
PIN15/LCD_D14: GPIO_CON.7 U1.29
PIN16/LCD_D15: GPIO_CON.5 U1.28
PIN17/LCD_D16: GPIO_CON.3 U1.19
PIN18/LCD_D17/LAN_RES: GPIO_CON.4 R32.1 U1.20
PIN19/LCD_DOTCLK: GPIO_CON.6 U1.17
PIN20/LCD_VSYNC: GPIO_CON.8 U1.16
PIN21/LCD_HSYNC/I2C_SDA: GPIO_CON.10 SDA_SW/SDA_HW.1 U1.15
PIN22/LCD_EN/I2C_SCL: GPIO_CON.12 SCL_SW/SCL_HW.1 U1.11
PIN23/LCD_DISP: GPIO_CON.14 U1.12
PIN24/LCD_WR: GPIO_CON.16 U1.13
PIN25/LCD_RS: GPIO_CON.18 R15.2 U1.14
PIN26/LCD_CS: GPIO_CON.20 U1.10
PIN27/PWM2 [PWR]: GPIO_CON.22 U1.91
PIN28/SOFT_SDA: GPIO_CON.24 SDA_SW/SDA_HW.3 U1.31
PIN29/SOFT_SCL: GPIO_CON.26 SCL_SW/SCL_HW.3 U1.34
PIN30: GPIO_CON.28 U1.81
PIN31: GPIO_CON.30 U1.82
PIN32/LRADC1: GPIO_CON.32 U1.107
PIN33/LRADC0: GPIO_CON.34 U1.108
PIN34/MIC: GPIO_CON.36 U1.116
PRTCTL2: U3.14 U4.1 U4.2
PRTCTL3: U3.16 U4.3 U4.4
PSWITCH: R23.1 U1.119
PWM0/DUART_RXD: D4.1 R1.1 U1.125
PWM1/DUART_TXD: U1.126 U_DEBUG.2
RASN: U1.62 U2.23
RESET: R9.2 RESET.2
SD_VCC: C29.2 C81.2 JTAG.5 L6.2 SD.4
SJTAG_PSW: PWR_BUT.1 R23.2 R24.2 REC.2 RM1.4.2 SJTAG.3
SSP1_CMD: JTAG.6 R21.1 SD.3 U1.83
SSP1_DATA0: JTAG.2 RM1.2.1 SD.7 U1.84
SSP1_DATA1: JTAG.1 RM1.3.1 SD.8 U1.85
SSP1_DATA2: JTAG.8 RM1.1.1 SD.1 U1.86
SSP1_DATA3: JTAG.7 R20.1 SD.2 U1.87
SSP1_SCK: JTAG.4 SD.5 U1.90
SSP2_MOSI: U1.21 UEXT.8
SSP2_SCK: U1.33 UEXT.9
TEST_PAD: T_P.P$1 U1.32
USB_DM: U1.123 U3.58
USB_DP: U1.124 U3.59
USB_PWR_A: C76.+ U4.8 USB_HOST.1.1
USB_PWR_B: C77.+ U4.5 USB_HOST.2.1
V+: C5.2 C6.2 C7.2 C8.2 C30.2 C31.2 C32.2 C33.2 C34.2 C35.2 C36.2 C37.2 C38.1 R16.2 R18.2 U1.38 U1.45 U1.53 U1.106 U2.1 U2.3 U2.9 U2.15 U2.18 U2.33 U2.55 U2.61
VCC [PWR]: 3.3V_E.2 3.3VIO_E.1 C41.2 C42.2 C43.2 C44.2 C45.2 C75.1 GPIO_CON.38 L4.1 LAN.AG LAN.AY R11.2 R12.2 R13.2 R29.1 R30.1 R46.1 SJTAG.1 U3.19 U3.27 U3.28 U3.29 U3.30 U3.32 U3.33 U3.39 U3.40 U3.46 UEXT.1
VDAC1: R26.1 U1.104
VDD: C53.1 C54.1 C55.1 C56.1 C57.1 C58.1 C59.1 L4.2 R37.2 R38.2 R39.2 R40.2 R41.2 U3.5 U3.10 U3.49 U3.51 U3.54 U3.57 U3.64
VDD4P2: C9.2 C10.2 D1.K U1.101
VDDXTAL: C22.2 PWR_BUT.2 U1.120
VPP [PWR]: 3.3VIO_E.2 C3.2 C4.2 C15.2 C16.2 C60.1 D00_H.2 D01_H.2 D2.2 D02_H.2 D03_H.2 L6.1 R1.2 R15.1 R21.2 R25.2 RESET.1 RM1.1.2 RM1.2.2 RM1.3.2 U1.18 U1.92 U1.95
WEN: U1.77 U2.21
XTALI: C23.2 Q1.2 T2.3 U1.122
XTALO: C24.2 Q1.1 T1.3 U1.121

## Tracks (layer width: path | path; a pad name or v marks a point on that pad's centre or on a via)
+5V  (via drill 0.4 pad 0.8, 0.6 pad 1)
  Top 0.203: U1.102 55.99,28.18 v56.01,28.19 56.13,28.19 C11.2
  Top 0.508: U6.1 4.89,43.25 v4.45,42.8
  Top 0.762: U6.4 1.78,45.15 1.78,45.21 | v1.78,45.85 1.78,45.21 | C73.1 1.14,44.58 1.78,45.21 | L7.2 67.18,21.34 v66.17,22.35
  Top 1.016: C11.2 C12.2 | R22.1 7.21,24.18 v7.21,29.67
  Route2 0.508: 58.01,48.49 55.73,46.2 | 55.73,46.2 | 55.73,46.2 55.73,34.8 56.9,33.63 56.9,28.19 | 56.9,28.19 v56.01,28.19 | 56.9,28.19 65.15,28.19 v65.53,27.81
  Route2 0.762: v65.53,27.81 66.17,27.18 v66.17,22.35
  Route2 1.016: GPIO_CON.37 58.01,48.49 | v4.45,42.8 4.19,42.8 1.78,45.21 v1.78,45.85
  Bottom 0.508: 59.44,47.88 59.69,47.62 61.59,47.62 63.12,49.15 63.12,52.32 61.98,53.47 11.68,53.47 10.54,52.32 10.54,49.4 8.89,47.75 4.27,47.75 3.94,47.42 5V_E.2 3.81,46.61 | v7.21,29.67 7.21,36.17 4.45,38.94 v4.45,42.8
  Bottom 0.762: v1.78,45.85 2.54,46.61 3.81,46.61
  Bottom 1.016: 59.44,47.88 GPIO_CON.37
+15V  (via drill 0.6 pad 1)
  Top 0.254: 1.14,33.66 R42.1 | 1.91,31.24 1.78,31.37 1.78,33.02 1.65,33.15
  Top 0.508: 1.65,33.15 1.14,33.66 | 1.91,31.24 2.29,30.86 6.1,30.86 v8.26,33.02
  Top 0.61: v8.26,33.02 U5.2
  Top 1.016: 12.69,18.19 D3.C | C68.+ 13.95,18.19 12.69,18.19 | 12.69,18.19 10.97,18.19 10.26,17.48 10.26,17.09 8.38,15.21 8.38,11.86 6.48,8.51 PWR.+
  Route2 1.016: v8.26,33.02 9.14,32.13 9.14,22.99 C68.+
  Bottom 0.508: v8.26,33.02 8.51,33.02 9.4,33.91 9.4,47.12 11.3,49.02 11.3,51.94 12.06,52.7 61.59,52.7 62.36,51.94 62.36,50.29 62.1,50.04
  Bottom 1.016: 62.1,50.04 GPIO_CON.39
+24V  (via drill 0.6 pad 1)
  Top 0.203: U1.100 53.34,27.38 53.34,27.69 | v52.96,27.69 53.34,27.69 | U1.103 53.34,28.58 53.34,27.69
  Top 0.762: C67.2 5.94,20.14 3.85,20.14 LIPO_BAT.1 | D1.A 65.27,23.72 v61.21,23.72 C21.2
  Top 1.016: C19.2 C20.2 C21.2
  Bottom 1.016: 10.41,20.95 10.41,46.61 GPIO_CON.1 | 10.41,20.95 12.95,18.41 23.62,18.41 27.81,14.22 43.84,14.22 46.76,17.14 48.64,17.14 51.18,19.68 54.13,19.68 57.17,22.73 57.17,24.99 | LIPO_BAT.1 4.66,20.95 10.41,20.95 | 57.17,24.99 60.53,24.99 61.21,24.31 v61.21,23.72 61.21,23.75 | v52.96,27.69 53.59,27.05 56.03,27.05 57.17,25.91 57.17,24.99
A0  (via drill 0.3 pad 0.5)
  Top 0.152: U1.76 45,26.63 v44.88,26.75 | U2.29 21.16,25.22 v21.26,25.32
  Bottom 0.152: v21.26,25.32 21.84,25.32 23.77,23.39 24,23.39 arc-90 24.16,23.24 24.16,23.09 arc90 24.31,22.94 24.38,22.94 arc90 24.54,23.09 24.54,23.16 arc-90 24.69,23.32 24.77,23.32 arc-90 24.92,23.16 24.92,23.09 arc90 25.07,22.94 25.15,22.94 arc90 25.3,23.09 25.3,23.16 arc-90 25.45,23.32 25.53,23.32 arc-90 25.68,23.16 25.68,23.09 arc90 25.83,22.94 25.91,22.94 arc90 26.06,23.09 26.06,23.16 arc-90 26.21,23.32 26.29,23.32 arc-90 26.44,23.16 26.44,23.09 arc90 26.59,22.94 26.67,22.94 arc90 26.82,23.09 26.82,23.16 arc-90 26.98,23.32 27.05,23.32 arc-90 27.2,23.16 27.2,23.09 arc90 27.36,22.94 27.43,22.94 arc90 27.58,23.09 27.58,23.16 arc-90 27.74,23.32 27.81,23.32 arc-90 27.96,23.16 27.96,23.09 arc90 28.12,22.94 28.19,22.94 arc90 28.35,23.09 28.35,23.16 arc-90 28.5,23.32 28.57,23.32 arc-90 28.73,23.16 28.73,23.09 arc90 28.88,22.94 37.49,22.94 39.47,24.92 41.6,24.92 43.74,27.05 44.58,27.05 v44.88,26.75
A1  (via drill 0.3 pad 0.5)
  Top 0.152: U2.30 20.14,24.54 v21.87,24.54 | U1.75 44.6,26.06 v44.15,26.52
  Bottom 0.152: v21.87,24.54 22.17,24.54 24.08,22.63 24.23,22.63 arc-90 24.38,22.48 24.38,22.43 arc90 24.51,22.3 24.61,22.3 arc90 24.77,22.45 24.77,22.48 arc-90 24.92,22.63 24.99,22.63 arc-90 25.15,22.48 25.15,22.4 arc90 25.3,22.25 25.38,22.25 arc90 25.53,22.4 25.53,22.48 arc-90 25.68,22.63 25.76,22.63 arc-90 25.91,22.48 25.91,22.4 arc90 26.06,22.25 26.14,22.25 arc90 26.29,22.4 26.29,22.48 arc-90 26.44,22.63 26.52,22.63 arc-90 26.67,22.48 26.67,22.4 arc90 26.82,22.25 26.9,22.25 arc90 27.05,22.4 27.05,22.48 arc-90 27.2,22.63 27.28,22.63 arc-90 27.43,22.48 27.43,22.4 arc90 27.58,22.25 27.66,22.25 arc90 27.81,22.4 27.81,22.48 arc-90 27.96,22.63 28.04,22.63 arc-90 28.19,22.48 28.19,22.4 arc90 28.35,22.25 28.42,22.25 arc90 28.57,22.4 28.57,22.48 arc-90 28.73,22.63 28.8,22.63 arc-90 28.96,22.48 28.96,22.4 arc90 29.11,22.25 29.18,22.25 arc90 29.34,22.4 29.34,22.48 arc-90 29.49,22.63 29.57,22.63 arc-90 29.72,22.48 29.72,22.4 arc90 29.87,22.25 29.95,22.25 arc90 30.1,22.4 30.1,22.48 arc-90 30.25,22.63 30.33,22.63 arc-90 30.48,22.48 30.48,22.4 arc90 30.63,22.25 30.71,22.25 arc90 30.86,22.4 30.86,22.48 arc-90 31.01,22.63 37.64,22.63 39.62,24.61 41.76,24.61 43.66,26.52 v44.15,26.52
A2  (via drill 0.3 pad 0.5)
  Top 0.152: U2.31 21.18,23.92 v21.26,24 | v43.76,25.86 43.94,25.86 44.2,25.6 U1.74
  Bottom 0.152: v21.26,24 22.25,24 24.31,21.95 24.38,21.95 arc-90 24.54,21.79 24.54,21.72 arc90 24.69,21.57 24.77,21.57 arc90 24.92,21.72 24.92,21.79 arc-90 25.07,21.95 25.15,21.95 arc-90 25.3,21.79 25.3,21.72 arc90 25.45,21.57 25.53,21.57 arc90 25.68,21.72 25.68,21.79 arc-90 25.83,21.95 25.91,21.95 arc-90 26.06,21.79 26.06,21.72 arc90 26.21,21.57 26.29,21.57 arc90 26.44,21.72 26.44,21.79 arc-90 26.59,21.95 26.67,21.95 arc-90 26.82,21.79 26.82,21.72 arc90 26.98,21.57 27.05,21.57 arc90 27.2,21.72 27.2,21.79 arc-90 27.36,21.95 27.43,21.95 arc-90 27.58,21.79 27.58,21.72 arc90 27.74,21.57 27.81,21.57 arc90 27.96,21.72 27.96,21.79 arc-90 28.12,21.95 28.19,21.95 arc-90 28.35,21.79 28.35,21.72 arc90 28.5,21.57 28.57,21.57 arc90 28.73,21.72 28.73,21.79 arc-90 28.88,21.95 28.96,21.95 arc-90 29.11,21.79 29.11,21.72 arc90 29.26,21.57 29.34,21.57 arc90 29.49,21.72 29.49,21.79 arc-90 29.64,21.95 29.72,21.95 arc-90 29.87,21.79 29.87,21.72 arc90 30.02,21.57 30.1,21.57 arc90 30.25,21.72 30.25,21.79 arc-90 30.4,21.95 30.48,21.95 arc-90 30.63,21.79 30.63,21.72 arc90 30.79,21.57 30.86,21.57 arc90 31.01,21.72 31.01,21.82 arc-90 31.17,21.97 31.24,21.97 arc-90 31.39,21.82 31.39,21.72 arc90 31.55,21.57 31.62,21.57 arc90 31.77,21.72 31.77,22.15 arc-90 31.95,22.33 37.8,22.33 39.78,24.31 41.91,24.31 43.46,25.86 v43.76,25.86
A3  (via drill 0.3 pad 0.5)
  Top 0.152: U2.32 21.67,23.27 v21.87,23.47 | U1.73 43.8,23.79 44.2,23.39 v44.42,23.39
  Bottom 0.152: v21.87,23.47 22.25,23.47 24.46,21.26 24.92,21.26 arc-90 25.07,21.11 25.07,21.03 arc90 25.22,20.88 25.3,20.88 arc90 25.45,21.03 25.45,21.11 arc-90 25.6,21.26 25.68,21.26 arc-90 25.83,21.11 25.83,21.03 arc90 25.98,20.88 26.06,20.88 arc90 26.21,21.03 26.21,21.11 arc-90 26.36,21.26 26.44,21.26 arc-90 26.59,21.11 26.59,21.03 arc90 26.75,20.88 26.82,20.88 arc90 26.98,21.03 26.98,21.11 arc-90 27.13,21.26 27.2,21.26 arc-90 27.36,21.11 27.36,21.03 arc90 27.51,20.88 27.58,20.88 arc90 27.74,21.03 27.74,21.11 arc-90 27.89,21.26 27.96,21.26 arc-90 28.12,21.11 28.12,21.03 arc90 28.27,20.88 28.35,20.88 arc90 28.5,21.03 28.5,21.11 arc-90 28.65,21.26 28.73,21.26 arc-90 28.88,21.11 28.88,21.03 arc90 29.03,20.88 29.11,20.88 arc90 29.26,21.03 29.26,21.11 arc-90 29.41,21.26 29.49,21.26 arc-90 29.64,21.11 29.64,21.03 arc90 29.79,20.88 29.87,20.88 arc90 30.02,21.03 30.02,21.11 arc-90 30.18,21.26 30.25,21.26 arc-90 30.4,21.11 30.4,21.03 arc90 30.56,20.88 30.63,20.88 arc90 30.79,21.03 30.79,21.11 arc-90 30.94,21.26 31.01,21.26 arc-90 31.17,21.11 31.17,21.03 arc90 31.32,20.88 31.39,20.88 arc90 31.55,21.03 31.55,21.11 arc-90 31.7,21.26 31.85,21.26 arc90 32.08,21.49 32.08,21.54 arc-45 32.16,21.71 32.39,21.95 arc-45 32.57,22.02 37.95,22.02 39.93,24 43.81,24 v44.42,23.39
A4  (via drill 0.3 pad 0.5)
  Top 0.152: U2.35 31.14,23.27 v30.02,24.38 | U1.72 43.4,23.74 43.89,23.25 v43.89,22.78
  Route2 0.152: v30.02,24.38 30.02,20.42 31.75,18.69 38.46,18.69 arc90 38.61,18.85 38.61,19.28 arc-90 38.76,19.43 38.84,19.43 arc-90 38.99,19.28 38.99,18.85 arc90 39.14,18.69 39.22,18.69 arc90 39.37,18.85 39.37,19.28 arc-90 39.52,19.43 39.6,19.43 arc-90 39.75,19.28 39.75,18.85 arc90 39.9,18.69 39.98,18.69 arc90 40.13,18.85 40.13,19.28 arc-90 40.28,19.43 40.36,19.43 arc-90 40.51,19.28 40.51,18.85 arc90 40.66,18.69 40.74,18.69 arc90 40.89,18.85 40.89,19.28 arc-90 41.05,19.43 41.12,19.43 arc-90 41.27,19.28 41.27,18.87 arc90 41.43,18.72 41.5,18.72 arc90 41.66,18.87 41.66,19.28 arc-90 41.81,19.43 41.88,19.43 arc-90 42.04,19.28 42.04,18.9 arc90 42.22,18.72 43.69,18.72 arc90 43.89,18.92 v43.89,22.78
A5  (via drill 0.3 pad 0.5)
  Top 0.152: U2.36 31.24,23.93 v30.79,24.38 | v43.2,23.16 43,23.37 U1.71
  Route2 0.152: v43.2,23.16 43.33,23.04 43.33,20.17 42.9,19.74 38.48,19.74 arc90 38.3,19.56 38.3,19.2 arc-90 38.15,19.05 38.06,19.05 arc-90 37.91,19.2 37.91,19.53 arc90 37.76,19.68 37.68,19.68 arc90 37.53,19.53 37.53,19.18 arc-90 37.38,19.02 37.3,19.02 arc-90 37.15,19.18 37.15,19.56 arc90 37,19.71 36.92,19.71 arc90 36.77,19.56 36.77,19.18 arc-90 36.62,19.02 36.54,19.02 arc-90 36.39,19.18 36.39,19.56 arc90 36.23,19.71 36.16,19.71 arc90 36.01,19.56 36.01,19.18 arc-90 35.85,19.02 35.78,19.02 arc-90 35.62,19.18 35.62,19.56 arc90 35.47,19.71 35.4,19.71 arc90 35.24,19.56 35.24,19.18 arc-90 35.09,19.02 35.02,19.02 arc-90 34.86,19.18 34.86,19.56 arc90 34.71,19.71 34.63,19.71 arc90 34.48,19.56 34.48,19.18 arc-90 34.33,19.02 34.25,19.02 arc-90 34.1,19.18 34.1,19.56 arc90 33.95,19.71 33.87,19.71 arc90 33.72,19.56 33.72,19.18 arc-90 33.57,19.02 33.49,19.02 arc-90 33.34,19.18 33.34,19.56 arc90 33.19,19.71 33.11,19.71 arc90 32.96,19.56 32.96,19.18 arc-90 32.81,19.02 32.73,19.02 arc-90 32.58,19.18 32.58,19.56 arc90 32.42,19.71 32.35,19.71 arc90 32.2,19.56 32.2,19.2 arc-90 32.04,19.05 31.97,19.05 arc-90 31.82,19.2 31.82,19.56 arc90 31.66,19.71 31.27,19.71 30.79,20.19 v30.79,24.38
A6  (via drill 0.3 pad 0.5)
  Top 0.152: U2.37 31.36,24.57 31.01,24.92 30.25,24.92 v30.02,25.15 | U1.70 v42.6,22.64 v42.6,22.63
  Route2 0.152: v30.02,25.15 30.25,24.92 31.01,24.92 31.32,24.61 31.32,20.22 arc90 31.52,20.02 31.67,20.02 arc90 31.83,20.17 31.83,20.75 arc-90 31.98,20.9 32.05,20.9 arc-90 32.21,20.75 32.21,20.17 arc90 32.36,20.02 32.56,20.02 arc90 32.72,20.17 32.72,20.34 arc-90 32.87,20.5 32.94,20.5 arc-90 33.1,20.34 33.1,20.17 arc90 33.25,20.02 33.33,20.02 arc90 33.48,20.17 33.48,20.34 arc-90 33.63,20.5 33.71,20.5 arc-90 33.86,20.34 33.86,20.17 arc90 34.01,20.02 34.09,20.02 arc90 34.24,20.17 34.24,20.34 arc-90 34.39,20.5 34.47,20.5 arc-90 34.62,20.34 34.62,20.17 arc90 34.77,20.02 34.85,20.02 arc90 35,20.17 35,20.34 arc-90 35.15,20.5 35.23,20.5 arc-90 35.38,20.34 35.38,20.17 arc90 35.53,20.02 35.61,20.02 arc90 35.76,20.17 35.76,20.34 arc-90 35.92,20.5 35.99,20.5 arc-90 36.14,20.34 36.14,20.17 arc90 36.3,20.02 36.37,20.02 arc90 36.52,20.17 36.52,20.34 arc-90 36.68,20.5 36.75,20.5 arc-90 36.91,20.34 36.91,20.17 arc90 37.06,20.02 37.13,20.02 arc90 37.29,20.17 37.29,20.34 arc-90 37.44,20.5 37.52,20.5 arc-90 37.67,20.34 37.67,20.14 arc90 37.82,19.99 37.9,19.99 arc90 38.05,20.14 38.05,20.32 arc-90 38.23,20.5 38.3,20.5 arc-90 38.48,20.32 38.48,20.19 arc90 38.63,20.04 38.71,20.04 arc90 38.86,20.19 38.86,20.34 arc-90 39.01,20.5 39.09,20.5 arc-90 39.24,20.34 39.24,20.19 arc90 39.4,20.04 39.47,20.04 arc90 39.62,20.19 39.62,20.34 arc-90 39.78,20.5 39.85,20.5 arc-90 40.01,20.34 40.01,20.19 arc90 40.16,20.04 40.23,20.04 arc90 40.39,20.19 40.39,20.34 arc-90 40.54,20.5 40.62,20.5 arc-90 40.77,20.34 40.77,20.19 arc90 40.92,20.04 42.19,20.04 42.6,20.45 v42.6,22.63
A7  (via drill 0.3 pad 0.5)
  Top 0.152: U2.38 31.88,25.3 30.94,25.3 v30.79,25.45 | v42.06,23.24 42.2,23.38 U1.69
  Route2 0.152: v30.79,25.45 30.94,25.45 31.62,24.77 31.62,21.49 arc90 31.85,21.26 31.95,21.26 arc90 32.16,21.46 32.16,21.95 arc-90 32.31,22.1 32.38,22.1 arc-90 32.54,21.95 32.54,20.95 arc90 32.69,20.8 32.77,20.8 arc90 32.92,20.95 32.92,21.18 arc-90 33.07,21.34 33.15,21.34 arc-90 33.3,21.18 33.3,20.95 arc90 33.45,20.8 33.53,20.8 arc90 33.68,20.95 33.68,21.18 arc-90 33.83,21.34 33.91,21.34 arc-90 34.06,21.18 34.06,20.95 arc90 34.21,20.8 34.29,20.8 arc90 34.44,20.95 34.44,21.18 arc-90 34.59,21.34 34.67,21.34 arc-90 34.82,21.18 34.82,20.95 arc90 34.98,20.8 35.05,20.8 arc90 35.2,20.95 35.2,21.18 arc-90 35.36,21.34 35.43,21.34 arc-90 35.59,21.18 35.59,20.95 arc90 35.74,20.8 35.81,20.8 arc90 35.97,20.95 35.97,21.18 arc-90 36.12,21.34 36.2,21.34 arc-90 36.35,21.18 36.35,20.95 arc90 36.5,20.8 36.58,20.8 arc90 36.73,20.95 36.73,21.18 arc-90 36.88,21.34 36.96,21.34 arc-90 37.11,21.18 37.11,20.95 arc90 37.26,20.8 37.34,20.8 arc90 37.49,20.95 37.49,21.18 arc-90 37.64,21.34 37.72,21.34 arc-90 37.87,21.18 37.87,20.95 arc90 38.02,20.8 38.1,20.8 arc90 38.25,20.95 38.25,21.18 arc-90 38.41,21.34 38.48,21.34 arc-90 38.63,21.18 38.63,20.95 arc90 38.79,20.8 38.86,20.8 arc90 39.01,20.95 39.01,21.18 arc-90 39.17,21.34 39.24,21.34 arc-90 39.4,21.18 39.4,20.95 arc90 39.55,20.8 39.62,20.8 arc90 39.78,20.95 39.78,21.18 arc-90 39.93,21.34 40.01,21.34 arc-90 40.16,21.18 40.16,20.95 arc90 40.31,20.8 40.39,20.8 arc90 40.54,20.95 40.54,21.18 arc-90 40.69,21.34 40.77,21.34 arc-90 40.92,21.18 40.92,20.86 arc90 41.07,20.7 41.15,20.7 arc90 41.3,20.86 41.3,22.12 arc-90 41.45,22.27 41.53,22.27 arc-90 41.68,22.12 41.68,21.51 arc90 41.83,21.36 41.91,21.36 arc90 42.06,21.51 42.06,22.4 arc90 41.91,22.55 41.83,22.55 arc-90 41.68,22.71 41.68,22.86 v42.06,23.24
A8  (via drill 0.3 pad 0.5)
  Top 0.152: U2.39 31.85,25.98 v30.18,25.98 | v40.97,22.63 41.45,23.11 41.45,23.39 41.8,23.74 U1.68
  Route2 0.152: v30.18,25.98 31.01,25.98 31.93,25.07 31.93,22.81 32.33,22.4 32.66,22.4 arc-90 32.84,22.23 32.84,21.79 arc90 32.99,21.64 33.07,21.64 arc90 33.22,21.79 33.22,22.25 arc-90 33.38,22.4 33.45,22.4 arc-90 33.6,22.25 33.6,21.79 arc90 33.76,21.64 33.83,21.64 arc90 33.98,21.79 33.98,22.25 arc-90 34.14,22.4 34.21,22.4 arc-90 34.37,22.25 34.37,21.79 arc90 34.52,21.64 34.59,21.64 arc90 34.75,21.79 34.75,22.25 arc-90 34.9,22.4 34.98,22.4 arc-90 35.13,22.25 35.13,21.79 arc90 35.28,21.64 35.36,21.64 arc90 35.51,21.79 35.51,22.33 arc-90 35.66,22.48 35.74,22.48 arc-90 35.89,22.33 35.89,21.79 arc90 36.04,21.64 36.12,21.64 arc90 36.27,21.79 36.27,22.33 arc-90 36.42,22.48 36.5,22.48 arc-90 36.65,22.33 36.65,21.79 arc90 36.8,21.64 36.88,21.64 arc90 37.03,21.79 37.03,22.33 arc-90 37.19,22.48 37.26,22.48 arc-90 37.41,22.33 37.41,21.79 arc90 37.57,21.64 37.64,21.64 arc90 37.8,21.79 37.8,22.33 arc-90 37.95,22.48 38.02,22.48 arc-90 38.18,22.33 38.18,21.79 arc90 38.33,21.64 38.41,21.64 arc90 38.56,21.79 38.56,22.33 arc-90 38.71,22.48 38.79,22.48 arc-90 38.94,22.33 38.94,21.79 arc90 39.09,21.64 39.17,21.64 arc90 39.32,21.79 39.32,22.33 arc-90 39.47,22.48 39.55,22.48 arc-90 39.7,22.33 39.7,21.79 arc90 39.85,21.64 39.93,21.64 arc90 40.08,21.79 40.08,22.33 arc-90 40.23,22.48 40.31,22.48 arc-90 40.46,22.33 40.46,21.79 arc90 40.62,21.64 40.69,21.64 arc90 40.84,21.79 40.84,22.5 v40.97,22.63
A9  (via drill 0.3 pad 0.5)
  Top 0.152: U2.40 v30.79,26.52 | v40.92,23.39 41,23.39 41.4,23.8 U1.67
  Route2 0.152: v30.79,26.52 31.09,26.52 32.23,25.38 32.23,24.08 32.46,23.85 32.59,23.85 arc-90 32.77,23.67 32.77,22.86 arc90 32.92,22.71 32.99,22.71 arc90 33.15,22.86 33.15,23.7 arc-90 33.3,23.85 33.38,23.85 arc-90 33.53,23.7 33.53,22.86 arc90 33.68,22.71 33.76,22.71 arc90 33.91,22.86 33.91,23.7 arc-90 34.06,23.85 34.14,23.85 arc-90 34.29,23.7 34.29,22.86 arc90 34.44,22.71 34.52,22.71 arc90 34.67,22.86 34.67,23.7 arc-90 34.82,23.85 34.9,23.85 arc-90 35.05,23.7 35.05,22.86 arc90 35.2,22.71 35.28,22.71 arc90 35.43,22.86 35.43,23.7 arc-90 35.59,23.85 35.66,23.85 arc-90 35.81,23.7 35.81,22.94 arc90 35.97,22.78 36.04,22.78 arc90 36.2,22.94 36.2,23.7 arc-90 36.35,23.85 36.42,23.85 arc-90 36.58,23.7 36.58,22.94 arc90 36.73,22.78 36.8,22.78 arc90 36.96,22.94 36.96,23.7 arc-90 37.11,23.85 37.19,23.85 arc-90 37.34,23.7 37.34,22.94 arc90 37.49,22.78 37.57,22.78 arc90 37.72,22.94 37.72,23.7 arc-90 37.87,23.85 37.95,23.85 arc-90 38.1,23.7 38.1,22.94 arc90 38.25,22.78 38.33,22.78 arc90 38.48,22.94 38.48,23.7 arc-90 38.63,23.85 38.71,23.85 arc-90 38.86,23.7 38.86,22.94 arc90 39.01,22.78 39.09,22.78 arc90 39.24,22.94 39.24,23.55 arc-90 39.4,23.7 39.47,23.7 arc-90 39.62,23.55 39.62,22.99 arc90 39.8,22.81 40.34,22.81 v40.92,23.39
A10  (via drill 0.3 pad 0.5)
  Top 0.152: U2.28 21.91,25.87 v22.48,26.44 | U1.66 41,25.99 v41.07,26.06
  Bottom 0.152: v22.48,26.44 22.48,26.06 24.23,24.31 29.03,24.31 29.49,23.85 31.06,23.85 arc90 31.32,24.11 31.32,24.43 arc-90 31.47,24.59 31.55,24.59 arc-90 31.7,24.43 31.7,24 arc90 31.85,23.85 31.93,23.85 arc90 32.08,24 32.08,24.38 arc-90 32.23,24.54 32.31,24.54 arc-90 32.46,24.38 32.46,24 arc90 32.61,23.85 32.69,23.85 arc90 32.84,24 32.84,24.38 arc-90 32.99,24.54 33.07,24.54 arc-90 33.22,24.38 33.22,24 arc90 33.38,23.85 33.45,23.85 arc90 33.6,24 33.6,24.38 arc-90 33.76,24.54 33.83,24.54 arc-90 33.98,24.38 33.98,24 arc90 34.14,23.85 34.21,23.85 arc90 34.37,24 34.37,24.38 arc-90 34.52,24.54 34.59,24.54 arc-90 34.75,24.38 34.75,24 arc90 34.9,23.85 34.98,23.85 arc90 35.13,24 35.13,24.38 arc-90 35.28,24.54 35.36,24.54 arc-90 35.51,24.38 35.51,24 arc90 35.66,23.85 35.74,23.85 arc90 35.89,24 35.89,24.38 arc-90 36.04,24.54 36.12,24.54 arc-90 36.27,24.38 36.27,24 arc90 36.42,23.85 36.5,23.85 arc90 36.65,24 36.65,24.31 arc-90 36.88,24.54 37.72,24.54 39.01,25.83 40.84,25.83 v41.07,26.06
A11  (via drill 0.3 pad 0.5)
  Top 0.152: U2.41 31.84,27.05 v30.18,27.05 | U1.65 40.6,23.91 v40.16,23.47
  Route2 0.152: v30.18,27.05 31.01,27.05 32.54,25.53 32.54,24.31 arc90 32.69,24.16 32.77,24.16 arc90 32.92,24.31 32.92,24.99 arc-90 33.07,25.15 33.15,25.15 arc-90 33.3,24.99 33.3,24.31 arc90 33.45,24.16 33.53,24.16 arc90 33.68,24.31 33.68,24.99 arc-90 33.83,25.15 33.91,25.15 arc-90 34.06,24.99 34.06,24.31 arc90 34.21,24.16 34.29,24.16 arc90 34.44,24.31 34.44,24.99 arc-90 34.59,25.15 34.67,25.15 arc-90 34.82,24.99 34.82,24.31 arc90 34.98,24.16 35.05,24.16 arc90 35.2,24.31 35.2,24.99 arc-90 35.36,25.15 35.43,25.15 arc-90 35.59,24.99 35.59,24.31 arc90 35.74,24.16 35.81,24.16 arc90 35.97,24.31 35.97,24.99 arc-90 36.12,25.15 36.2,25.15 arc-90 36.35,24.99 36.35,24.31 arc90 36.5,24.16 36.58,24.16 arc90 36.73,24.31 36.73,24.92 arc-90 36.88,25.07 36.96,25.07 arc-90 37.11,24.92 37.11,24.31 arc90 37.26,24.16 37.34,24.16 arc90 37.49,24.31 37.49,24.92 arc-90 37.64,25.07 37.72,25.07 arc-90 37.87,24.92 37.87,24.31 arc90 38.02,24.16 38.1,24.16 arc90 38.25,24.31 38.25,24.92 arc-90 38.41,25.07 38.48,25.07 arc-90 38.63,24.92 38.63,24.31 arc90 38.79,24.16 38.86,24.16 arc90 39.01,24.31 39.01,24.92 arc-90 39.17,25.07 39.24,25.07 arc-90 39.4,24.92 39.4,24.16 arc90 39.55,24 39.62,24 arc90 39.78,24.16 39.78,25.09 arc-90 39.93,25.25 40.01,25.25 arc-90 40.16,25.09 v40.16,23.47
A12  (via drill 0.3 pad 0.5)
  Top 0.152: U2.42 31.02,27.82 v30.79,27.58 | U1.64 40.12,26.18 v40.31,26.36
  Route2 0.152: v30.79,27.58 30.79,27.94 arc-90 30.94,28.09 31.19,28.09 arc-90 31.42,27.86 31.42,27.28 arc90 31.57,27.13 31.8,27.13 arc-90 31.95,27.28 32.03,27.28 arc-90 32.18,27.13 32.18,26.42 arc90 32.33,26.26 32.41,26.26 arc90 32.56,26.42 32.56,26.44 arc-90 32.72,26.59 32.79,26.59 arc-90 32.94,26.44 32.94,25.6 arc90 33.1,25.45 33.17,25.45 arc90 33.33,25.6 33.33,26.44 arc-90 33.48,26.59 33.55,26.59 arc-90 33.71,26.44 33.71,25.6 arc90 33.86,25.45 33.93,25.45 arc90 34.09,25.6 34.09,26.75 arc-90 34.24,26.9 34.31,26.9 arc-90 34.47,26.75 34.47,25.6 arc90 34.62,25.45 34.7,25.45 arc90 34.85,25.6 34.85,26.75 arc-90 35,26.9 35.08,26.9 arc-90 35.23,26.75 35.23,25.6 arc90 35.38,25.45 35.46,25.45 arc90 35.61,25.6 35.61,26.59 arc-90 35.76,26.75 35.84,26.75 arc-90 35.99,26.59 35.99,25.6 arc90 36.14,25.45 36.22,25.45 arc90 36.37,25.6 36.37,26.44 arc-90 36.52,26.59 36.6,26.59 arc-90 36.75,26.44 36.75,25.6 arc90 36.98,25.38 38.1,25.38 arc90 38.33,25.6 38.33,26.67 arc-90 38.48,26.82 38.56,26.82 arc-90 38.71,26.67 38.71,25.53 arc90 38.86,25.38 38.94,25.38 arc90 39.09,25.53 39.09,26.67 arc-90 39.24,26.82 39.32,26.82 arc-90 39.47,26.67 39.47,25.73 arc90 39.62,25.58 39.7,25.58 arc90 39.85,25.73 39.85,26.21 arc-90 40.01,26.36 v40.31,26.36
AUART1_RXD  (via drill 0.4 pad 0.8)
  Top 0.203: U1.128 53.85,38.58 v53.85,40.11
  Bottom 0.254: 72.77,50.55 72.39,50.16 72.39,47.88 72.14,47.62 70.23,47.62 66.8,44.2 61.95,44.2 60.05,42.29 56.29,42.29 54.1,40.11 v53.85,40.11
  Bottom 1.016: 72.77,50.55 UEXT.4
AUART1_TXD  (via drill 0.4 pad 0.8)
  Top 0.203: U1.127 55.43,38.18 57.61,40.36 57.61,46.05 58.32,46.76 v58.93,46.76
  Route2 0.203: v58.93,46.76 59.18,47.02 71.78,47.02 72.87,48.11
  Route2 1.016: 72.87,48.11 UEXT.3
BA0  (via drill 0.3 pad 0.5)
  Top 0.152: U2.26 21.6,27.17 v21.87,26.9 | U1.79 46.2,27.1 45.64,27.66 v45.64,28.04
  Bottom 0.152: v21.87,26.9 21.87,26.21 24.08,24 28.88,24 29.34,23.55 37.19,23.55 39.17,25.53 41.3,25.53 43.43,27.66 45.26,27.66 v45.64,28.04
BA1  (via drill 0.3 pad 0.5)
  Top 0.152: U2.27 21.18,26.52 v21.26,26.44 | U1.80 46.6,27.7 v46.43,27.86
  Bottom 0.152: v21.26,26.44 21.26,26.36 23.93,23.7 28.73,23.7 29.18,23.24 37.34,23.24 39.32,25.22 41.45,25.22 43.59,27.36 45.92,27.36 v46.43,27.86
CASN  (via drill 0.3 pad 0.5)
  Top 0.152: U2.22 20.13,29.79 v21.87,29.79 | U1.61 37.82,27.38 v37.64,27.2
  Bottom 0.152: v21.87,29.79 22.1,30.02 23.04,30.02 arc-90 23.24,29.82 23.24,29.06 arc90 23.42,28.88 23.44,28.88 arc90 23.62,29.06 23.62,29.9 arc-90 23.77,30.05 23.85,30.05 arc-90 24,29.9 24,29.03 arc90 24.16,28.88 24.23,28.88 arc90 24.38,29.03 24.38,29.87 arc-90 24.54,30.02 24.61,30.02 arc-90 24.77,29.87 24.77,29.03 arc90 24.92,28.88 24.99,28.88 arc90 25.15,29.03 25.15,29.87 arc-90 25.3,30.02 25.38,30.02 arc-90 25.53,29.87 25.53,29.06 arc90 25.68,28.91 25.76,28.91 arc90 25.91,29.06 25.91,29.87 arc-90 26.06,30.02 26.14,30.02 arc-90 26.29,29.87 26.29,29.11 arc90 26.44,28.96 26.52,28.96 arc90 26.67,29.11 26.67,29.87 arc-90 26.82,30.02 26.9,30.02 arc-90 27.05,29.87 27.05,29.11 arc90 27.2,28.96 27.28,28.96 arc90 27.43,29.11 27.43,29.87 arc-90 27.58,30.02 27.66,30.02 arc-90 27.81,29.87 27.81,29.16 arc90 28.02,28.96 31.09,28.96 32.54,27.51 32.54,27.28 32.92,26.9 36.88,26.9 37.19,27.2 v37.64,27.2
CKE  (via drill 0.3 pad 0.5)
  Top 0.152: U1.78 45.8,27.07 45.29,27.58 43.89,27.58 43.51,27.2 v42.22,27.2 | U2.44 32.55,29.12 32.92,28.75 32.92,27.71 v33.15,27.48